# Altium PCB STM32F103RB最小系统.PcbDoc (part 1 of 2)
Units mil, origin at the board's own origin, x right, y up, seen from the top; angles counter-clockwise.
Board outline 1970 x 2120 mil, 2 copper layers (Top Layer, Bottom Layer); 27 components, 58 nets, 187 pads, 61 vias.
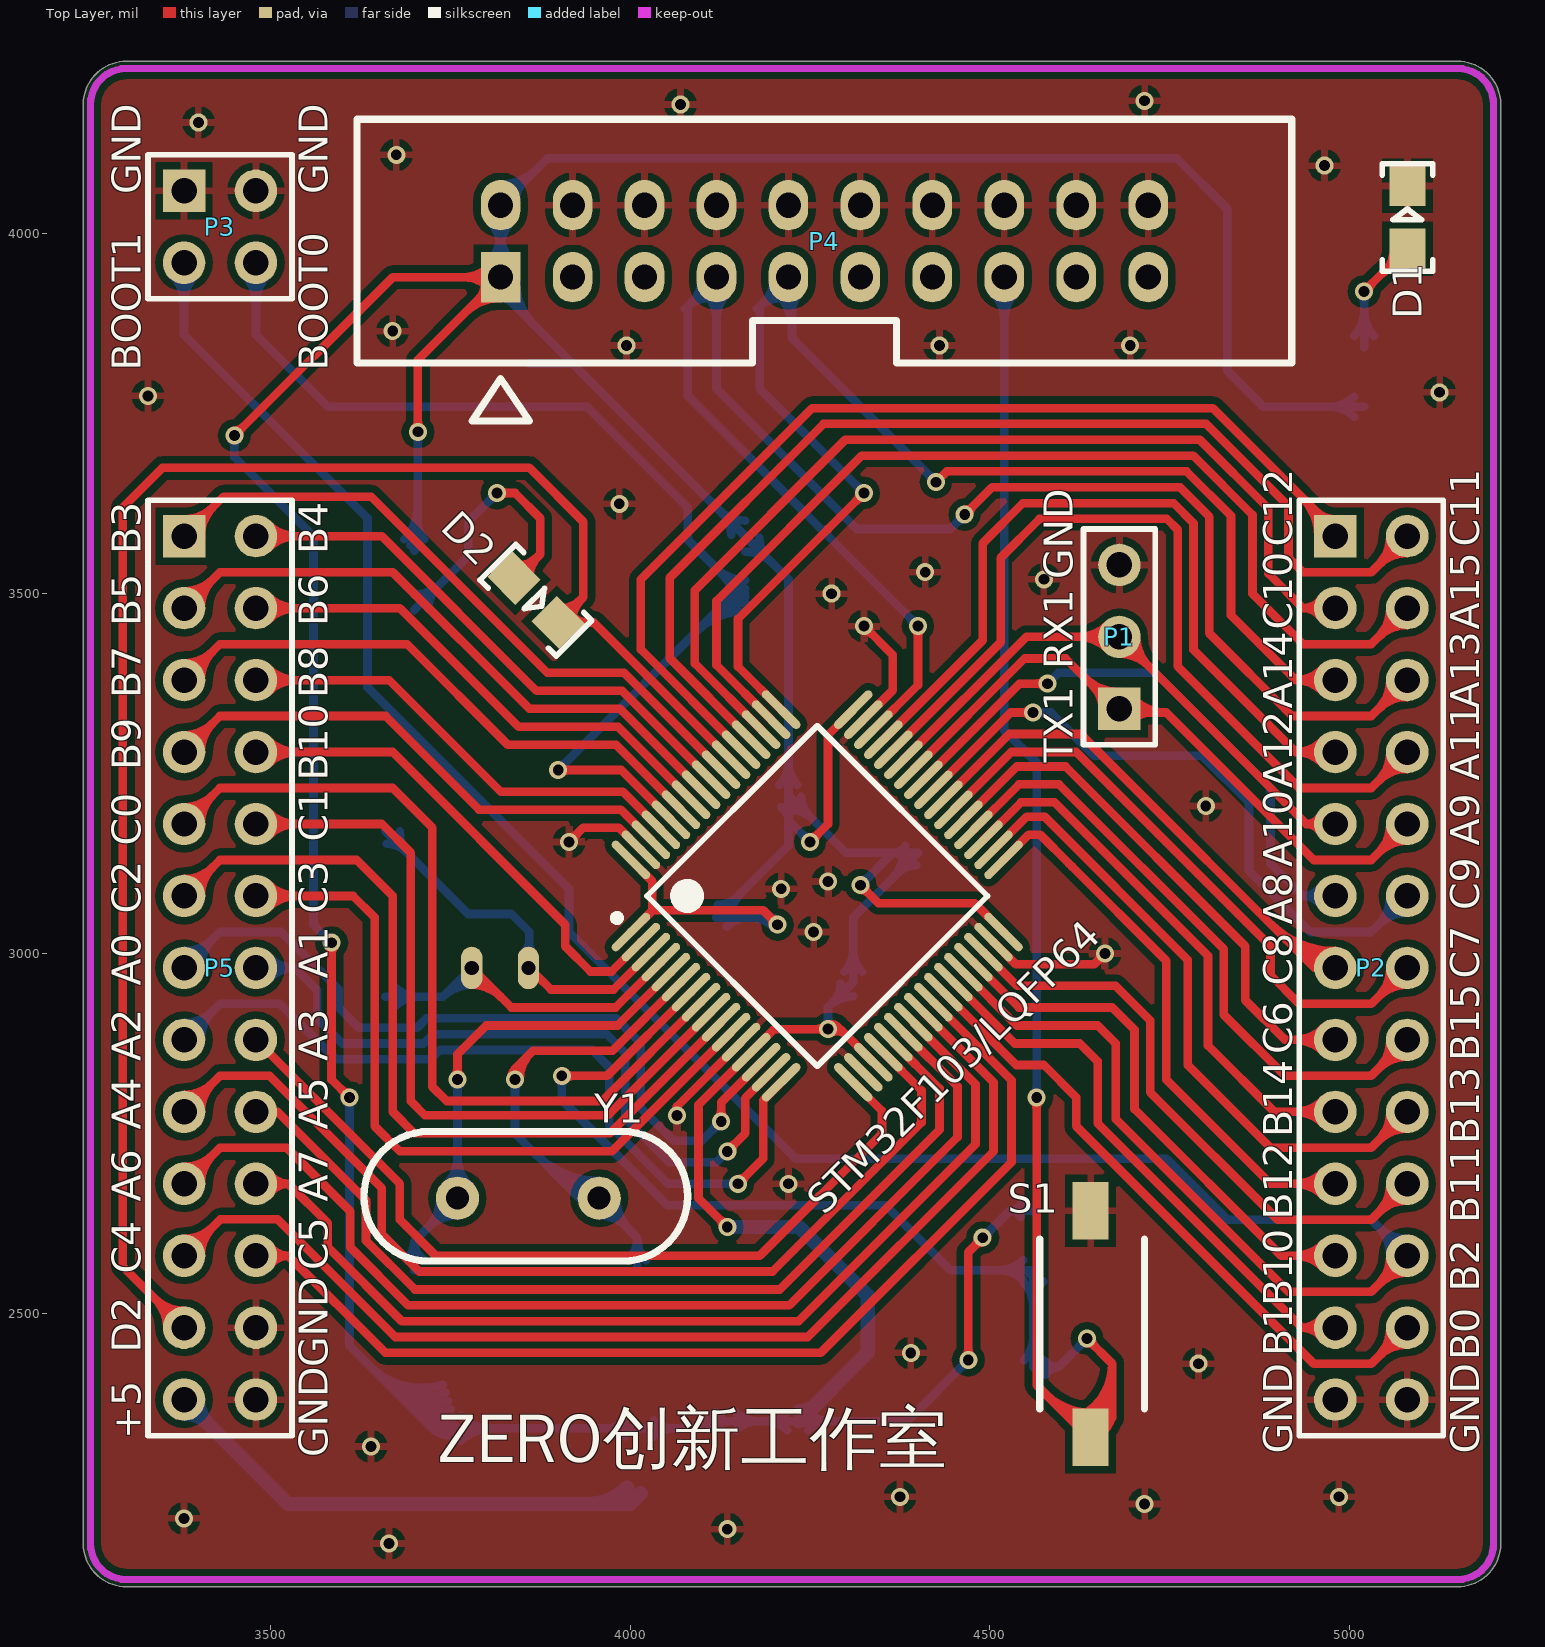
[diagram p0: Top Layer view]
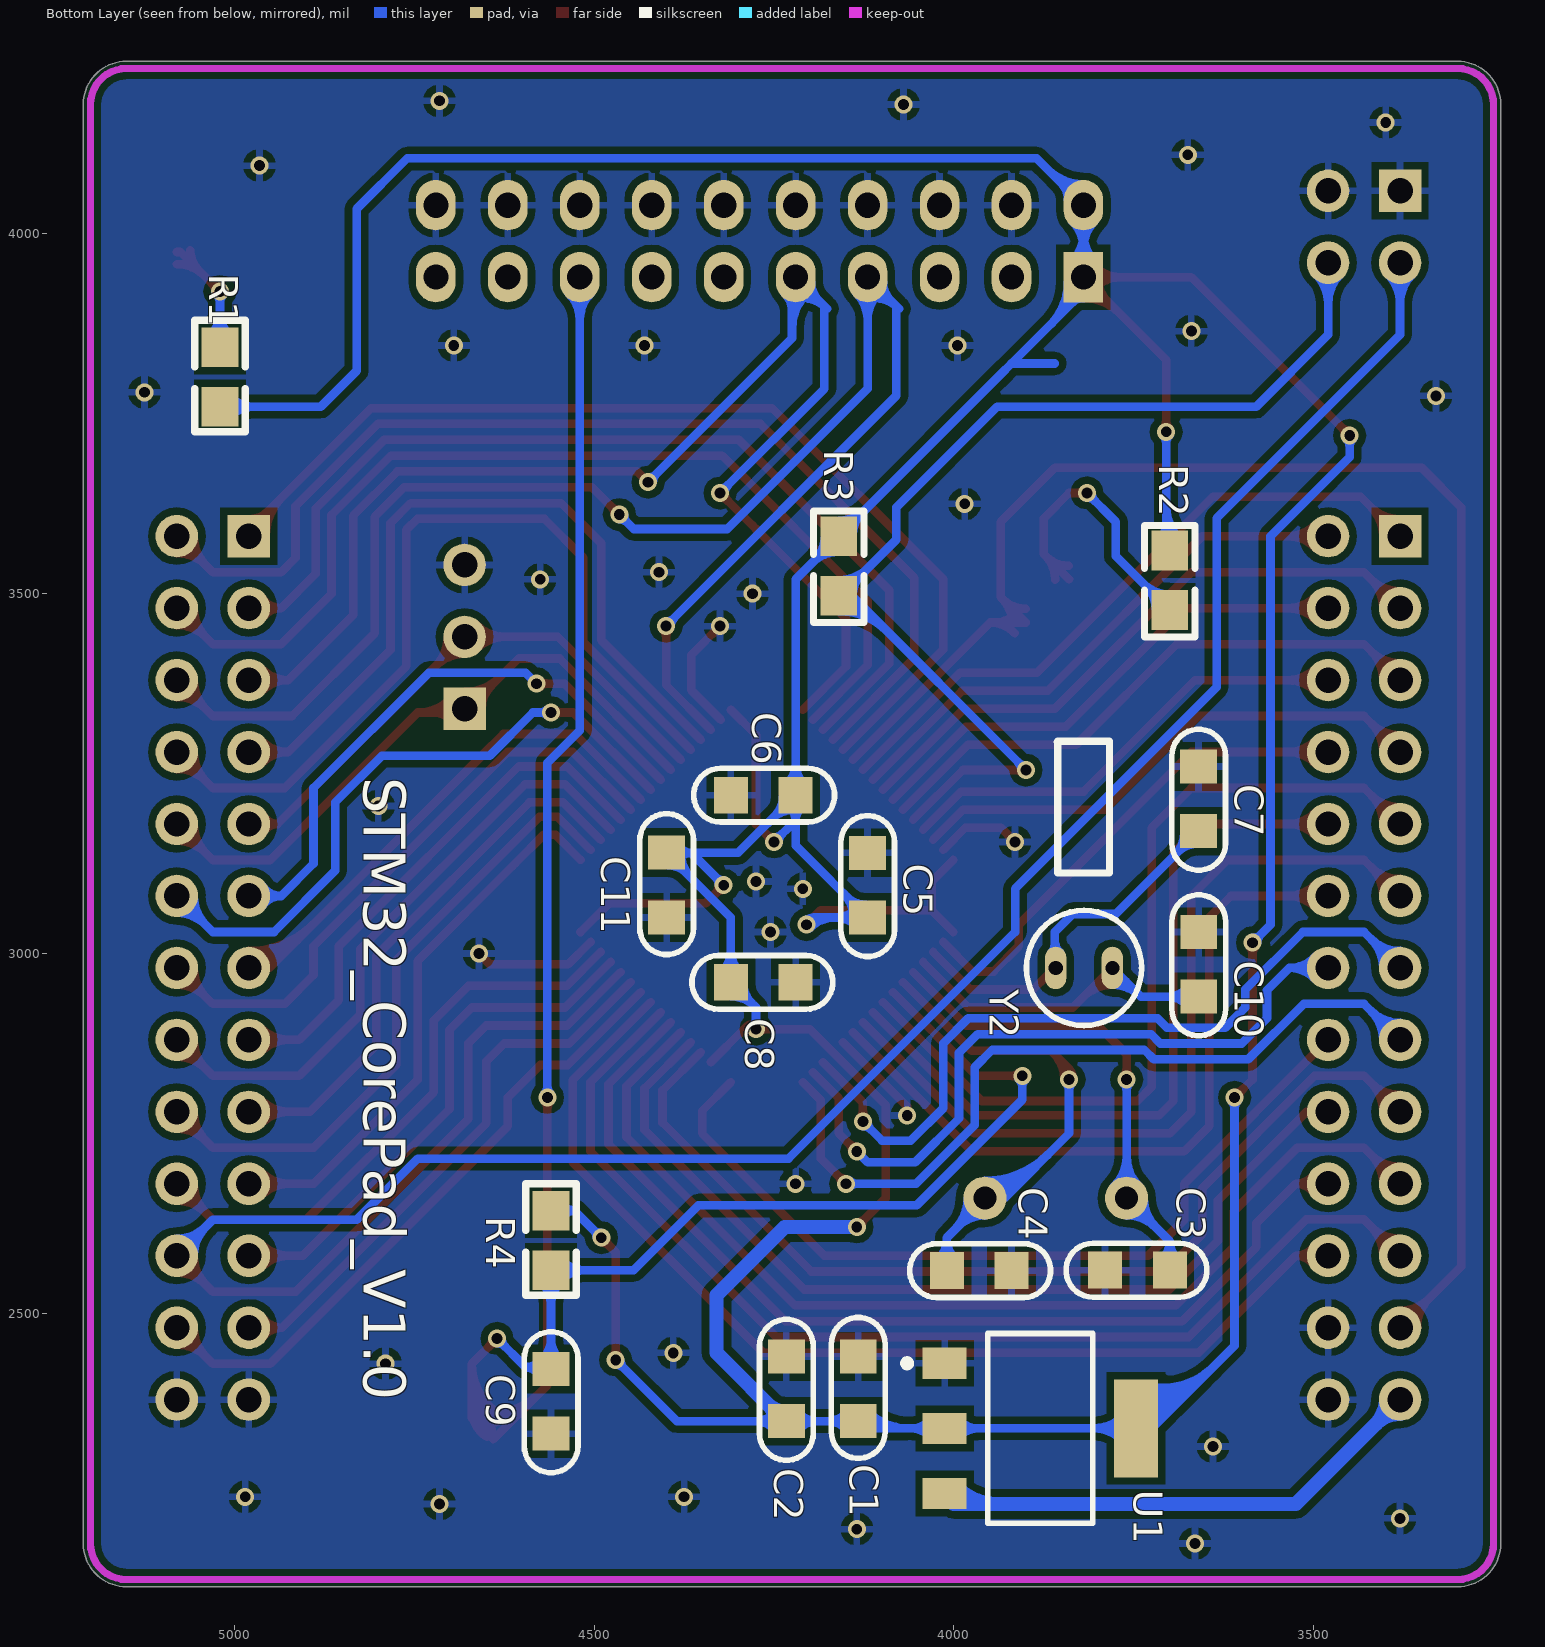
[diagram p1: Bottom Layer view, seen from below]

## Layer stack, top to bottom
Top Layer: signal copper 1.4
Dielectric: dielectric 12.6, FR-4, Dk 4.8
Bottom Layer: signal copper 1.4

## Board outline
3240,4175 3240,2180 ccw(c3300,2180) 3300,2120 5150,2120 ccw(c5150,2180) 5210,2180 5210,4180 ccw(c5150,4180) 5150,4240 3300,4240 ccw(c3300,4180) 3240,4180

## Design rules (kind name [scope] priority, off if disabled: settings)
Clearance [All] p1: gap=10
PolygonConnect [All] p1: connectstyle=Relief reliefconductorwidth=10 reliefentries=4 polygonreliefangle="90 Angle" airgapwidth=10
RoutingVias [All] p1: holewidth=15 width=25 viastyle="Through Hole" minholewidth=15 minwidth=25 maxholewidth=15 maxwidth=25
SilkToSolderMaskClearance SilkscreenOverComponentPads [IsPad] p1: minsilkscreentomaskgap=10 clearancetoexposedcopper=TRUE
SolderMaskExpansion [All] p1: expansion=4
Width [All] p1: maxlimit=20 minlimit=12 preferedwidth=12
27 further rules are at their usual default settings.

## Components (designator, comment, footprint, x,y, rotation, side; value= is the part's Value field where it differs from the comment)
C1 "0.1uF" 0805C 4133.61,2439.86 r0 bottom
C2 "10uF" 0805C 4232.14,2350.14 r180 bottom
C3 "22pF" 0805C 3789.86,2559.27 r270 bottom
C4 "22pF" 0805C 3920,2560 r90 bottom
C5 "0.1uF" 0805C 4119.27,3050.14 r180 bottom
C6 "0.1uF" 0805C 4220.14,3220.73 r90 bottom
C7 "15pF" 0805C 3659.26,3170.14 r180 bottom
C8 "0.1uF" 0805C 4309.86,2959.27 r270 bottom
C9 "0.1uF" 0805C 4559.27,2332.82 r180 bottom
C10 "15pF" 0805C 3659.11,2940.09 r180 bottom
C11 "0.1uF" 0805C 4400,3140 r0 bottom
D1 "LED" LED0805 5080,3980 r90 top
D2 "LED" LED0805 3838.88,3521.49 r315 top
P1 "TTL" HDR1X3 4680,3340 r90 top
P2 "Header 13X2" HDR2X13 4980,3580 r270 top
P3 "Header 2X2" HDR2X2 3380,4060 r270 top
P4 "JTAG" JTAG20 3820,3940 r180 top
P5 "Header 13X2" HDR2X13 3380,3580 r270 top
R1 "1K" 0805R 5020,3760 r90 bottom
R2 "1K" 0805R 3700,3560 r270 bottom
R3 "1K" 0805R 4160,3580 r270 bottom
R4 "10K" 0805R 4560,2560 r90 bottom
S1 "KEY" KEY_SOP 4640,2327.72 r90 top
STM32F103/LQFP64 "STM32F103RBT6" LQFP64_N 4260,3080 r45 top (schematic designator U2)
U1 "REG1117-3.3" ZZ311 3880,2340 r270 bottom
Y1 "8M" OSC2PR-1 3956.45,2660.16 r180 top
Y2 "32.768k" XTAL-B 3820,2980 r0 bottom

## Footprints (in the part's own frame and the unit in brackets; to place one, negate y for a bottom-side part, rotate by r counter-clockwise, add the part's x,y. Pads: shape width x height; smd on the part's side, far side on the other; paste and mask are expansions set on the pad)
0805C [mm]
  rect 1.3x1.2 smd: 1(-0.019,-0.004) 2(-0.019,2.282)
  silkscreen extent -0.97,-1.38 0.93,3.59
0805R [mm] "功率 1/8W"
  rect 1.4x1.3 smd: 1(0,0) 2(2.1,0)
  silkscreen extent -0.89,-0.89 3.05,0.89
HDR1X3 [mm] "Connector; Header; 3 Position"
  rect 1.5x1.5 hole 0.9: 1(0,0)
  round 1.5 hole 0.9: 2(2.54,0) 3(5.08,0)
  silkscreen extent -1.27,-1.27 6.35,1.27
HDR2X2 [mm] "Connector; Header; 2x2 Position"
  rect 1.5x1.5 hole 0.9: 1(0,0)
  round 1.5 hole 0.9: 2(0,2.54) 3(2.54,0) 4(2.54,2.54)
  silkscreen extent -1.27,-1.27 3.81,3.81
HDR2X13 [mm] "Connector; Header; 13x2 Position"
  rect 1.5x1.5 hole 0.9: 1(0,0)
  round 1.5 hole 0.9: 2(0,2.54) 3(2.54,0) 4(2.54,2.54) 5(5.08,0) 6(5.08,2.54) 7(7.62,0) 8(7.62,2.54) 9(10.16,0) 10(10.16,2.54) 11(12.7,0) 12(12.7,2.54) 13(15.24,0) 14(15.24,2.54) 15(17.78,0) 16(17.78,2.54) 17(20.32,0) 18(20.32,2.54) 19(22.86,0) 20(22.86,2.54) 21(25.4,0) 22(25.4,2.54) 23(27.94,0) 24(27.94,2.54) 25(30.48,0) 26(30.48,2.54)
  silkscreen extent -1.27,-1.27 31.75,3.81
JTAG20 [mil]
  rect 55x70 hole 35: 1(0,0)
  oval 55x70 hole 35: 2(0,-100) 3(-100,0) 4(-100,-100) 5(-200,0) 6(-200,-100) 7(-300,0) 8(-300,-100) 9(-400,0) 10(-400,-100) 11(-500,0) 12(-500,-100) 13(-600,0) 14(-600,-100) 15(-700,0) 16(-700,-100) 17(-800,0) 18(-800,-100) 19(-900,0) 20(-900,-100)
  silkscreen extent -1100,-219 200,200
KEY_SOP [mil] "间距 8.68"
  rect 80x50 smd: 1(0,0) 2(314.96,0)
  silkscreen extent 39,-75 276,71
LED0805 [mm]
  rect 1.4x1.27 smd: 1(-0.008,-0.007) 2(2.202,-0.007)
  silkscreen extent -0.81,-0.9 2.99,0.88
LQFP64_N [mm] "Thin QFP, 64-Leads, Body 10x10mm, Pitch 0.5mm, IPC Medium Density"
  oval 1.8x0.3 smd: 1(-5.55,3.75) 2(-5.55,3.25) 3(-5.55,2.75) 4(-5.55,2.25) 5(-5.55,1.75) 6(-5.55,1.25) 7(-5.55,0.75) 8(-5.55,0.25) 9(-5.55,-0.25) 10(-5.55,-0.75) 11(-5.55,-1.25) 12(-5.55,-1.75) 13(-5.55,-2.25) 14(-5.55,-2.75) 15(-5.55,-3.25) 16(-5.55,-3.75) 33(5.55,-3.75) 34(5.55,-3.25) 35(5.55,-2.75) 36(5.55,-2.25) 37(5.55,-1.75) 38(5.55,-1.25) 39(5.55,-0.75) 40(5.55,-0.25) 41(5.55,0.25) 42(5.55,0.75) 43(5.55,1.25) 44(5.55,1.75) 45(5.55,2.25) 46(5.55,2.75) 47(5.55,3.25) 48(5.55,3.75)
  oval 0.3x1.8 smd: 17(-3.75,-5.55) 18(-3.25,-5.55) 19(-2.75,-5.55) 20(-2.25,-5.55) 21(-1.75,-5.55) 22(-1.25,-5.55) 23(-0.75,-5.55) 24(-0.25,-5.55) 25(0.25,-5.55) 26(0.75,-5.55) 27(1.25,-5.55) 28(1.75,-5.55) 29(2.25,-5.55) 30(2.75,-5.55) 31(3.25,-5.55) 32(3.75,-5.55) 49(3.75,5.55) 50(3.25,5.55) 51(2.75,5.55) 52(2.25,5.55) 53(1.75,5.55) 54(1.25,5.55) 55(0.75,5.55) 56(0.25,5.55) 57(-0.25,5.55) 58(-0.75,5.55) 59(-1.25,5.55) 60(-1.75,5.55) 61(-2.25,5.55) 62(-2.75,5.55) 63(-3.25,5.55) 64(-3.75,5.55)
  silkscreen extent -5.67,-4.25 4.25,4.57, body extent -5,-5 5,5, height 1.6
OSC2PR-1 [mil]
  round 60 hole 32: 1(-0.55,0.16) 2(196.45,0.16)
  silkscreen extent -124,-92 326,88
XTAL-B [mm]
  oval 0.75x1.5 hole 0.5: 1(-1.02,0.001) 2(0.98,0.001)
  silkscreen extent -2.05,-8 2.01,2.03
ZZ311 [mm] "SOT-223/SC-73; 4 Leads; Body 6.7 x 7.3 mm, inc. leads (LxW max)"
  rect 1.1x1.55 smd: 1(-2.3,-3.375) 2(0,-3.375) 3(2.3,-3.375)
  rect 3.45x1.55 smd: 4(0,3.375)
  silkscreen extent -3.35,-4.83 3.35,1.85

## Part data
C1 C3 C4 C5 C6 C7 C8 C9 C10 C11: library part Cap, "Capacitor"
C2: library part "Cap Pol1", "Polarized Capacitor (Radial)"
P1: library part "Header 3", "Header, 3-Pin"
P2 P5: "Header, 13-Pin, Dual row"
P3: "Header, 2-Pin, Dual row"
P4: library part "Header 10X2", "Header, 10-Pin, Dual row"
R1 R2 R3 R4: library part Res2, "Resistor"
STM32F103/LQFP64: "STM32 ARM-based 32-bit MCU with 128 Kbytes Flash, 64-pin LQFP, Industrial Temperature"
U1: "800mA and 1A Low Dropout Positive Regulator 2.85V, 3.3V, 5V, and Adjustable"
Y1 Y2: library part XTAL, "Crystal Oscillator"

## Via types
v1: diameter 25, hole 15, Top Layer to Bottom Layer, 61 vias

## Nets (pads, with @x,y where several pads share a name; then routed paths per layer and width w, separated by ;. In a path a pad name is that pad's centre, name@x,y a point inside that pad or via, vN(x,y) a via of type N, cw(c..) or ccw(c..) an arc to the next point about the centre after c; other vN are vias at no path point)
+3.3: C1.2 C2.1 C5.1 C6.1 C8.1 C11.1 P4.1 P4.2 R1.1 R2.1 R3.1 R4.2 STM32F103/LQFP64.1 STM32F103/LQFP64.13 STM32F103/LQFP64.19 STM32F103/LQFP64.32 STM32F103/LQFP64.48 STM32F103/LQFP64.64 U1.2 U1.4 | length 13937.5
  Top Layer w12: v1(3450,3720) 3670,3940 P4.1@3820,3940 3705,3825 v1(3705,3725) ; v1(3585,3015) 3585,2825 v1(3610,2800) ; STM32F103/LQFP64.64@4001.1,3130.11 4030.6,3100.6 4030.6,3059.4 ; STM32F103/LQFP64.1@4025.6,3054.4 STM32F103/LQFP64.1@4001.1,3029.89 4030.6,3059.4 ; v1(4135,2620) 4095,2660 4095,2789.73 STM32F103/LQFP64.13@4168.13,2862.86 4200.27,2895 v1(4275,2895) 4291.89,2895 STM32F103/LQFP64.19@4337.95,2848.94 ; v1(4205,3040) 4185,3060 4031.21,3060 4030.6,3059.4 ; v1(4250,3155) 4275,3180 4275,3303.79 STM32F103/LQFP64.48@4310.11,3338.9 ; v1(4320,3095) 4345,3070 4478.79,3070 STM32F103/LQFP64.32@4518.9,3029.89 ; v1(4470,2435) 4470,2585 v1(4490,2605) ; 3461.1,3731.1 cw(c3450,3742.19) 3450,3726.5 ccw(c3450,3742.19) 3461.1,3731.1 ; 3461.1,3731.1 ccw(c3472.19,3720) 3456.5,3720 cw(c3472.19,3720) 3461.1,3731.1 ; 3585,2999.31 cw(c3600.69,2999.31) 3589.6,3010.4 ccw(c3600.69,2999.31) 3585,2999.31 ; 3585,2999.31 ccw(c3569.31,2999.31) 3580.4,3010.4 cw(c3569.31,2999.31) 3585,2999.31 ; 3598.9,2811.1 cw(c3587.81,2800) 3603.5,2800 ccw(c3587.81,2800) 3598.9,2811.1 ; 3598.9,2811.1 ccw(c3610,2822.19) 3610,2806.5 cw(c3610,2822.19) 3598.9,2811.1 ; 3705,3740.69 cw(c3689.31,3740.69) 3700.4,3729.6 ccw(c3689.31,3740.69) 3705,3740.69 ; 3705,3740.69 ccw(c3720.69,3740.69) 3709.6,3729.6 cw(c3720.69,3740.69) 3705,3740.69 ; 3768.09,3940 cw(c3768.09,3888.09) 3804.8,3924.8 ccw(c3768.09,3888.09) 3768.09,3940 ; 3768.09,3940 ccw(c3768.09,3991.91) 3804.8,3955.2 cw(c3768.09,3991.91) 3768.09,3940 ; 4123.9,2631.1 cw(c4112.81,2620) 4128.5,2620 ccw(c4112.81,2620) 4123.9,2631.1 ; 4123.9,2631.1 ccw(c4135,2642.19) 4135,2626.5 cw(c4135,2642.19) 4123.9,2631.1 ; 4193.9,3051.1 cw(c4182.81,3040) 4198.5,3040 ccw(c4182.81,3040) 4193.9,3051.1 ; 4193.9,3051.1 ccw(c4205,3062.19) 4205,3046.5 cw(c4205,3062.19) 4193.9,3051.1 ; 4259.31,2895 cw(c4259.31,2879.31) 4270.4,2890.4 ccw(c4259.31,2879.31) 4259.31,2895 ; 4259.31,2895 ccw(c4259.31,2910.69) 4270.4,2899.6 cw(c4259.31,2910.69) 4259.31,2895 ; 4261.1,3166.1 cw(c4250,3177.19) 4250,3161.5 ccw(c4250,3177.19) 4261.1,3166.1 ; 4261.1,3166.1 ccw(c4272.19,3155) 4256.5,3155 cw(c4272.19,3155) 4261.1,3166.1 ; 4290.69,2895 cw(c4290.69,2910.69) 4279.6,2899.6 ccw(c4290.69,2910.69) 4290.69,2895 ; 4290.69,2895 ccw(c4290.69,2879.31) 4279.6,2890.4 cw(c4290.69,2879.31) 4290.69,2895 ; 4331.1,3083.9 cw(c4342.19,3095) 4326.5,3095 ccw(c4342.19,3095) 4331.1,3083.9 ; 4331.1,3083.9 ccw(c4320,3072.81) 4320,3088.5 cw(c4320,3072.81) 4331.1,3083.9 ; 4470,2450.69 cw(c4454.31,2450.69) 4465.4,2439.6 ccw(c4454.31,2450.69) 4470,2450.69 ; 4470,2450.69 ccw(c4485.69,2450.69) 4474.6,2439.6 cw(c4485.69,2450.69) 4470,2450.69 ; 4478.9,2593.9 cw(c4490,2582.81) 4490,2598.5 ccw(c4490,2582.81) 4478.9,2593.9 ; 4478.9,2593.9 ccw(c4467.81,2605) 4483.5,2605 cw(c4467.81,2605) 4478.9,2593.9 ; 3770.49,3890.49 cw(c3820,3840.99) 3820,3911 ccw(c3820,3840.99) 3770.49,3890.49 ; 3788.6,3908.6 ccw(c3764.7,3932.5) 3798.5,3932.5 cw(c3764.7,3932.5) 3788.6,3908.6 ; 3790.98,3910.98 cw(c3820,3881.96) 3820,3923 ccw(c3820,3881.96) 3790.98,3910.98 ; v1@4272.22,2899.75 cw(c4279.36,2887.56) 4289.34,2897.55 ccw(c4279.36,2887.56) v1@4272.22,2899.75 ; v1@4278.28,2889.39 cw(c4287.47,2873.7) 4300.33,2886.56 ccw(c4287.47,2873.7) v1@4278.28,2889.39
  Bottom Layer w12: v1(3450,3720) 3450,3690 3560,3580 3560,3040 v1(3585,3015) ; v1(3610,2800) 3610,2455 3725,2340 U1.4@3750,2340 ; 3639.77,2425.23 ccw(c3709.91,2495.37) U1.4@3739.75,2400.78 ; 3653.75,2411.25 ccw(c3716.61,2474.12) U1.4@3743.36,2389.33 ; 3667.73,2397.27 ccw(c3723.32,2452.86) U1.4@3746.97,2377.89 ; 3681.71,2383.29 ccw(c3730.02,2431.61) U1.4@3750.58,2366.45 ; 3695.69,2369.31 ccw(c3736.73,2410.35) U1.4@3754.19,2355 ; R2.1@3700,3560 3705,3565 v1(3705,3725) ; 3709.67,2355.33 ccw(c3743.44,2389.1) U1.4@3757.8,2343.56 ; U1.4@3723.65,2341.35 ccw(c3750.14,2367.84) U1.4@3761.41,2332.11 ; U1.4@3747.13,2340 4015,2340 4120,2340 4130,2350 C1.2@4132.87,2350 C2.1@4232.87,2350 4235,2350 4385,2350 v1(4470,2435) ; U1.4@3764.46,2322.67 cw(c3806.3,2280.82) 3806.3,2340 cw(c3806.3,2399.18) U1.4@3764.46,2357.33 ; 3860,3820 3920,3820 ; 3966.22,2340 ccw(c3966.22,2377.79) U1.2@3992.95,2351.07 ; 3966.23,2340 cw(c3966.23,2302.21) U1.2@3992.95,2328.93 ; U1.2@4032.8,2328.93 cw(c4059.52,2302.21) 4059.52,2340 cw(c4059.52,2377.79) U1.2@4032.8,2351.07 ; 4064.22,2340 ccw(c4064.22,2416.69) C1.2@4118.44,2362.46 ; 4093.19,2340 ccw(c4093.19,2387.71) C1.2@4126.93,2353.98 ; C1.2@4147.3,2337.54 cw(c4177.39,2307.46) 4177.39,2350 cw(c4177.39,2392.54) C1.2@4147.3,2362.46 ; 4195,3050 C5.1@4120,3050 4220,3150 4220,3185 ; C2.1@4218.44,2337.54 ccw(c4188.36,2307.46) 4188.36,2350 ccw(c4188.36,2392.54) C2.1@4218.44,2362.46 ; C2.1@4247.3,2337.54 cw(c4277.39,2307.46) 4277.39,2350 cw(c4277.39,2392.54) C2.1@4247.3,2362.46 ; v1(4250,3155) 4220,3185 ; v1(4275,2895) 4275,2925 C8.1@4310,2960 4310,3050 4400,3140 4365,3140 ; v1(4320,3095) 4365,3140 ; v1(4490,2605) 4527.68,2642.68 ; R4.2@4560,2642.68 4527.68,2642.68 ; R1.1@5020,3760 4880,3760 4830,3810 4830,4035 4760,4105 3885,4105 P4.2@3820,4040 3820,3920 3920,3820 ; 3450,3704.31 cw(c3465.69,3704.31) 3454.6,3715.4 ccw(c3465.69,3704.31) 3450,3704.31 ; 3450,3704.31 ccw(c3434.31,3704.31) 3445.4,3715.4 cw(c3434.31,3704.31) 3450,3704.31 ; 3573.9,3026.1 cw(c3562.81,3015) 3578.5,3015 ccw(c3562.81,3015) 3573.9,3026.1 ; 3573.9,3026.1 ccw(c3585,3037.19) 3585,3021.5 cw(c3585,3037.19) 3573.9,3026.1 ; 3610,2784.31 cw(c3625.69,2784.31) 3614.6,2795.4 ccw(c3625.69,2784.31) 3610,2784.31 ; 3610,2784.31 ccw(c3594.31,2784.31) 3605.4,2795.4 cw(c3594.31,2784.31) 3610,2784.31 ; 3705,3709.31 cw(c3720.69,3709.31) 3709.6,3720.4 ccw(c3720.69,3709.31) 3705,3709.31 ; 3705,3709.31 ccw(c3689.31,3709.31) 3700.4,3720.4 cw(c3689.31,3709.31) 3705,3709.31 ; 3820,3980.59 cw(c3871.91,3980.59) 3835.2,4017.3 ccw(c3871.91,3980.59) 3820,3980.59 ; 3820,3980.59 ccw(c3768.09,3980.59) 3804.8,4017.3 cw(c3768.09,3980.59) 3820,3980.59 ; 3820,3999.41 cw(c3768.09,3999.41) 3804.8,3962.7 ccw(c3768.09,3999.41) 3820,3999.41 ; 3820,3999.41 ccw(c3871.91,3999.41) 3835.2,3962.7 cw(c3871.91,3999.41) 3820,3999.41 ; 3920,3820 3935,3805 R3.1@4160,3580 4220,3520 C6.1@4220,3220 ; 4164.51,3050 cw(c4164.51,3092.54) 4134.43,3062.46 ccw(c4164.51,3092.54) 4164.51,3050 ; 4164.51,3050 ccw(c4164.51,3007.46) 4134.43,3037.54 cw(c4164.51,3007.46) 4164.51,3050 ; 4220,3185 cw(c4242.14,3185) 4229.81,3203.39 ccw(c4242.14,3185) 4220,3185 ; 4220,3185 ccw(c4197.86,3185) 4210.19,3203.39 cw(c4197.86,3185) 4220,3185 ; 4220,3185 C6.1@4220,3220 ; C6.1@4220,3220 4300,3140 4365,3140 ; 4220,3264.51 cw(c4177.46,3264.51) 4207.54,3234.43 ccw(c4177.46,3264.51) 4220,3264.51 ; 4220,3264.51 ccw(c4262.54,3264.51) 4232.46,3234.43 cw(c4262.54,3264.51) 4220,3264.51 ; 4238.9,3166.1 cw(c4227.81,3155) 4243.5,3155 ccw(c4227.81,3155) 4238.9,3166.1 ; 4238.9,3166.1 ccw(c4250,3177.19) 4250,3161.5 cw(c4250,3177.19) 4238.9,3166.1 ; 4275,2910.69 cw(c4259.31,2910.69) 4270.4,2899.6 ccw(c4259.31,2910.69) 4275,2910.69 ; 4275,2910.69 ccw(c4290.69,2910.69) 4279.6,2899.6 cw(c4290.69,2910.69) 4275,2910.69 ; 4310,3004.51 cw(c4267.46,3004.51) 4297.54,2974.43 ccw(c4267.46,3004.51) 4310,3004.51 ; 4310,3004.51 ccw(c4352.54,3004.51) 4322.46,2974.43 cw(c4352.54,3004.51) 4310,3004.51 ; 4331.1,3106.1 cw(c4320,3117.19) 4320,3101.5 ccw(c4320,3117.19) 4331.1,3106.1 ; 4331.1,3106.1 ccw(c4342.19,3095) 4326.5,3095 cw(c4342.19,3095) 4331.1,3106.1 ; 4365,3140 cw(c4365,3119.05) 4382.54,3130.5 ccw(c4365,3119.05) 4365,3140 ; 4365,3140 ccw(c4365,3160.62) 4382.42,3149.58 cw(c4365,3160.62) 4365,3140 ; 4458.9,2423.9 cw(c4470,2412.81) 4470,2428.5 ccw(c4470,2412.81) 4458.9,2423.9 ; 4458.9,2423.9 ccw(c4447.81,2435) 4463.5,2435 cw(c4447.81,2435) 4458.9,2423.9 ; 4501.1,2616.1 cw(c4490,2627.19) 4490,2611.5 ccw(c4490,2627.19) 4501.1,2616.1 ; 4501.1,2616.1 ccw(c4512.19,2605) 4496.5,2605 cw(c4512.19,2605) 4501.1,2616.1 ; 4527.68,2642.68 cw(c4527.68,2625.81) 4542.63,2633.61 ccw(c4527.68,2625.81) 4527.68,2642.68 ; 4527.68,2642.68 ccw(c4527.68,2659.54) 4542.63,2651.74 cw(c4527.68,2659.54) 4527.68,2642.68 ; 4972.7,3760 cw(c4972.7,3712.7) 5006.15,3746.15 ccw(c4972.7,3712.7) 4972.7,3760 ; 4972.7,3760 ccw(c4972.7,3807.3) 5006.15,3773.85 cw(c4972.7,3807.3) 4972.7,3760 ; R2.1@3686.15,3575.82 ccw(c3640.63,3621.34) 3705,3621.34 cw(c3640.63,3621.34) R2.1@3686.15,3575.82 ; R2.1@3694.63,3567.34 ccw(c3669.6,3592.37) 3705,3592.37 cw(c3669.6,3592.37) R2.1@3694.63,3567.34 ; 3705,3597.19 ccw(c3735.22,3597.19) 3713.85,3575.82 cw(c3735.22,3597.19) 3705,3597.19 ; P4.1@3820,3911 cw(c3820,3889.27) 3835.36,3904.64 ccw(c3820,3889.27) P4.1@3820,3911 ; P4.2@3820,4057 ccw(c3820,4098.04) 3849.02,4069.02 cw(c3820,4098.04) P4.2@3820,4057 ; P4.2@3820,4069 ccw(c3820,4139.01) 3869.51,4089.51 cw(c3820,4139.01) P4.2@3820,4069 ; P4.1@3829.5,3932.5 ccw(c3882.61,3932.5) 3845.06,3894.94 cw(c3882.61,3932.5) P4.1@3829.5,3932.5 ; P4.1@3841.5,3932.5 ccw(c3923.58,3932.5) 3865.54,3874.46 cw(c3923.58,3932.5) P4.1@3841.5,3932.5 ; P4.2@3841.5,4047.5 cw(c3875.3,4047.5) 3851.4,4071.4 ccw(c3875.3,4047.5) P4.2@3841.5,4047.5 ; C5.1@4121.97,3067.62 ccw(c4121.97,3105.41) 4148.69,3078.69 cw(c4121.97,3105.41) C5.1@4121.97,3067.62 ; 4123.2,3616.8 ccw(c4160,3653.61) 4160,3601.56 cw(c4160,3653.61) 4123.2,3616.8 ; 4127.95,3612.05 cw(c4097.87,3581.97) 4140.41,3581.97 ccw(c4097.87,3581.97) 4127.95,3612.05 ; C5.1@4139.59,3050 cw(c4186.89,3050) 4153.44,3083.44 ccw(c4186.89,3050) C5.1@4139.59,3050 ; R3.1@4160,3558.44 cw(c4160,3506.39) 4196.8,3543.2 ccw(c4160,3506.39) R3.1@4160,3558.44 ; 4165.17,3050 cw(c4165.17,3000.17) 4200.4,3035.4 ccw(c4165.17,3000.17) 4165.17,3050 ; R3.1@4179.59,3578.03 ccw(c4222.13,3578.03) 4192.05,3547.95 cw(c4222.13,3578.03) R3.1@4179.59,3578.03 ; 4194.14,3050 cw(c4194.14,3029.14) 4208.89,3043.89 ccw(c4194.14,3029.14) 4194.14,3050 ; C6.1@4220,3200.41 cw(c4220,3153.11) 4253.44,3186.56 ccw(c4220,3153.11) C6.1@4220,3200.41 ; C6.1@4237.62,3218.03 ccw(c4275.41,3218.03) 4248.69,3191.31 cw(c4275.41,3218.03) C6.1@4237.62,3218.03 ; 4276.56,2926.56 cw(c4310,2893.11) 4310,2940.41 ccw(c4310,2893.11) 4276.56,2926.56 ; 4281.31,2931.31 ccw(c4254.59,2958.03) 4292.38,2958.03 cw(c4254.59,2958.03) 4281.31,2931.31 ; 4365.21,3105.21 ccw(c4330.27,3140.14) 4379.68,3140.14 cw(c4330.27,3140.14) 4365.21,3105.21 ; 4372.06,3112.06 cw(c4397.3,3086.83) 4397.3,3122.52 ccw(c4397.3,3086.83) 4372.06,3112.06
  Bottom Layer w20: v1(4135,2620) 4235,2620 4330,2525 4330,2445 C2.1@4235,2350 ; C2.1@4234.84,2363.62 ccw(c4234.84,2396.89) C2.1@4258.37,2373.37 ; C2.1@4248.46,2350 cw(c4280.97,2350) C2.1@4257.99,2372.99
+5: P5.25 U1.3 | length 910.2
  Bottom Layer w20: P5.25@3380,2380 3525,2235 4000,2235 U1.3@4015,2250 ; 3941,2235 ccw(c3941,2312.47) U1.3@3995.78,2257.69 ; 3413.34,2346.66 cw(c3446.67,2380) 3399.53,2380 ccw(c3446.67,2380) 3413.34,2346.66 ; 3413.34,2346.66 ccw(c3380,2313.33) 3380,2360.47 cw(c3380,2313.33) 3413.34,2346.66
BOOT0: P3.4 R3.2 STM32F103/LQFP64.60 | length 2283
  Top Layer w12: v1(3900,3255) 3987.56,3255 STM32F103/LQFP64.60@4056.78,3185.79 ; 3915.69,3255 cw(c3915.69,3270.69) 3904.6,3259.6 ccw(c3915.69,3270.69) 3915.69,3255 ; 3915.69,3255 ccw(c3915.69,3239.31) 3904.6,3250.4 cw(c3915.69,3239.31) 3915.69,3255
  Bottom Layer w12: P3.4@3480,3960 3480,3860 3580,3760 3940,3760 4080,3620 4080,3575 4160,3495 4140,3495 v1(3900,3255) ; 3480,3903.2 cw(c3536.8,3903.2) 3496.64,3943.36 ccw(c3536.8,3903.2) 3480,3903.2 ; 3480,3903.2 ccw(c3423.2,3903.2) 3463.36,3943.36 cw(c3423.2,3903.2) 3480,3903.2 ; 3911.1,3266.1 cw(c3900,3277.19) 3900,3261.5 ccw(c3900,3277.19) 3911.1,3266.1 ; 3911.1,3266.1 ccw(c3922.19,3255) 3906.5,3255 cw(c3922.19,3255) 3911.1,3266.1 ; 4093.02,3448.02 cw(c4160,3381.04) 4160,3475.76 ccw(c4160,3381.04) 4093.02,3448.02 ; 4113.5,3468.5 cw(c4160,3422.01) 4160,3487.76 ccw(c4160,3422.01) 4113.5,3468.5 ; 4119.23,3535.77 ccw(c4160,3576.53) 4160,3518.88 cw(c4160,3576.53) 4119.23,3535.77 ; 4129.59,3525.41 cw(c4103.47,3499.29) 4140.41,3499.29 ccw(c4103.47,3499.29) 4129.59,3525.41 ; 4133.99,3488.99 cw(c4160,3462.98) 4160,3499.76 ccw(c4160,3462.98) 4133.99,3488.99 ; R3.2@4139.72,3515.28 ccw(c4160,3535.56) 4160,3506.88 cw(c4160,3535.56) R3.2@4139.72,3515.28
BOOT1: P2.22 P3.3 STM32F103/LQFP64.28 | length 3926.3
  Top Layer w12: STM32F103/LQFP64.28@4463.22,2974.21 4537.44,2900 4650,2900 4675,2875 4675,2770 4915,2530 5030,2530 P2.22@5080,2580 ; 5039.84,2539.84 cw(c5080,2499.67) 5080,2556.47 ccw(c5080,2499.67) 5039.84,2539.84 ; 5039.84,2539.84 ccw(c4999.67,2580) 5056.47,2580 cw(c4999.67,2580) 5039.84,2539.84
  Bottom Layer w12: P3.3@3380,3960 3380,3860 3635,3605 3635,3370 3915,3090 3915,3030 4230,2715 4275,2715 ; 4270,2715 4275,2715 ; P2.22@5080,2580 5030,2630 4830,2630 4745,2715 4275,2715 ; 3380,3903.2 cw(c3436.8,3903.2) 3396.64,3943.36 ccw(c3436.8,3903.2) 3380,3903.2 ; 3380,3903.2 ccw(c3323.2,3903.2) 3363.36,3943.36 cw(c3323.2,3903.2) 3380,3903.2 ; 5039.84,2620.16 cw(c4999.67,2580) 5056.47,2580 ccw(c4999.67,2580) 5039.84,2620.16 ; 5039.84,2620.16 ccw(c5080,2660.33) 5080,2603.53 cw(c5080,2660.33) 5039.84,2620.16
GND: C1.1 C2.2 C3.1 C4.1 C5.2 C6.2 C7.2 C8.2 C9.1 C10.2 C11.2 D1.2 P1.3 P2.25 P2.26 P3.1 P3.2 P4.4 P4.6 P4.8 P4.10 P4.12 P4.14 P4.16 P4.18 P4.20 P5.24 P5.26 S1.2 STM32F103/LQFP64.12 STM32F103/LQFP64.18 STM32F103/LQFP64.31 STM32F103/LQFP64.47 STM32F103/LQFP64.63 U1.1 | length 696.1
  Top Layer w12: v1(3915,3155) 3935,3175 3984.05,3175 STM32F103/LQFP64.63@4015.02,3144.03 ; v1(4065,2775) 4065,2787.56 STM32F103/LQFP64.12@4154.21,2876.78 ; STM32F103/LQFP64.47@4324.03,3324.98 4365,3365.95 4365,3415 v1(4325,3455) ; STM32F103/LQFP64.31@4504.98,3015.97 4535.95,2985 4645,2985 v1(4660,3000) ; 3926.1,3166.1 cw(c3915,3177.19) 3915,3161.5 ccw(c3915,3177.19) 3926.1,3166.1 ; 3926.1,3166.1 ccw(c3937.19,3155) 3921.5,3155 cw(c3937.19,3155) 3926.1,3166.1 ; 4336.1,3443.9 cw(c4347.19,3455) 4331.5,3455 ccw(c4347.19,3455) 4336.1,3443.9 ; 4336.1,3443.9 ccw(c4325,3432.81) 4325,3448.5 cw(c4325,3432.81) 4336.1,3443.9
  other v1: 3665,2180 4135,2200 3380,2215 4715,2235 4375,2245 4985,2245 3640,2315 4790,2430 4390,2445 4220,2680 4255,3030 4210,3090 4275,3100 4800,3205 4280,3500 4575,3520 4410,3530 3985,3625 3330,3775 5125,3780 3995,3845 4430,3845 4695,3845 3670,3865 4965,4095 3675,4110 3400,4155 4070,4180 4715,4185
NetC3_2: C3.2 STM32F103/LQFP64.5 Y1.2 | length 1243.5
  Top Layer w12: v1(3760,2825) 3760,2860 3800,2900 3982.56,2900 STM32F103/LQFP64.5@4056.78,2974.21 ; 3760,2840.69 cw(c3744.31,2840.69) 3755.4,2829.6 ccw(c3744.31,2840.69) 3760,2840.69 ; 3760,2840.69 ccw(c3775.69,2840.69) 3764.6,2829.6 cw(c3775.69,2840.69) 3760,2840.69
  Bottom Layer w12: C3.2@3700,2560 3700,2600 ; v1(3760,2825) Y1.2@3760,2660 3700,2600 ; 3700,2600 cw(c3667.78,2600) 3688.61,2575.41 ccw(c3667.78,2600) 3700,2600 ; 3700,2600 ccw(c3732.22,2600) 3711.39,2575.41 cw(c3732.22,2600) 3700,2600 ; 3719.03,2619.03 cw(c3760,2578.06) 3760,2636 ccw(c3760,2578.06) 3719.03,2619.03 ; 3719.03,2619.03 ccw(c3678.06,2660) 3736,2660 cw(c3678.06,2660) 3719.03,2619.03 ; 3760,2717.94 cw(c3702.06,2717.94) 3743.03,2676.97 ccw(c3702.06,2717.94) 3760,2717.94 ; 3760,2717.94 ccw(c3817.94,2717.94) 3776.97,2676.97 cw(c3817.94,2717.94) 3760,2717.94 ; 3760,2809.31 cw(c3775.69,2809.31) 3764.6,2820.4 ccw(c3775.69,2809.31) 3760,2809.31 ; 3760,2809.31 ccw(c3744.31,2809.31) 3755.4,2820.4 cw(c3744.31,2809.31) 3760,2809.31
NetC4_2: C4.2 STM32F103/LQFP64.6 Y1.1 | length 1630.6
  Top Layer w12: v1(3840,2825) 3840,2840 3865,2865 3975.4,2865 STM32F103/LQFP64.6@4070.7,2960.29 ; v1@3834.5,2825 cw(c3857.43,2825) 3841.22,2841.22 ccw(c3857.43,2825) v1@3834.5,2825 ; v1@3846.5,2825 cw(c3898.41,2825) 3861.7,2861.7 ccw(c3898.41,2825) v1@3846.5,2825
  Bottom Layer w12: v1(3840,2825) 3840,2750 3930,2660 Y1.1@3955,2660 ; Y1.1@3960,2660 Y1.1@3955,2660 ; C4.2@4009.86,2559.27 4009.86,2605.14 Y1.1@3955,2660 ; 3840,2809.31 cw(c3855.69,2809.31) 3844.6,2820.4 ccw(c3855.69,2809.31) 3840,2809.31 ; 3840,2809.31 ccw(c3824.31,2809.31) 3835.4,2820.4 cw(c3824.31,2809.31) 3840,2809.31 ; 4009.86,2603.78 cw(c3967.32,2603.78) 3997.4,2573.7 ccw(c3967.32,2603.78) 4009.86,2603.78 ; 4009.86,2603.78 ccw(c4052.41,2603.78) 4022.32,2573.7 cw(c4052.41,2603.78) 4009.86,2603.78 ; 3869.94,2720.06 ccw(c3957,2807.13) 3957,2684 cw(c3957,2807.13) 3869.94,2720.06 ; 3890.42,2699.58 ccw(c3957,2766.16) 3957,2672 cw(c3957,2766.16) 3890.42,2699.58 ; 3910.91,2679.09 ccw(c3957,2725.19) Y1.1@3957,2660 cw(c3957,2725.19) 3910.91,2679.09 ; Y1.1@3957,2636 cw(c3957,2582.89) 3994.55,2620.45 ccw(c3957,2582.89) Y1.1@3957,2636 ; Y1.1@3969,2660 ccw(c4002.8,2660) 3978.9,2636.1 cw(c4002.8,2660) Y1.1@3969,2660 ; Y1.1@3981,2660 ccw(c4043.78,2660) 3999.39,2615.61 cw(c4043.78,2660) Y1.1@3981,2660
NetC7_1: C7.1 STM32F103/LQFP64.3 Y2.2 | length 764.8
  Top Layer w12: Y2.2@3860,2980 3890,2950 3976.89,2950 STM32F103/LQFP64.3@4028.94,3002.05 ; Y2.2@3857.53,2980.39 cw(c3857.83,2976.13) 3860.85,2979.15 ccw(c3857.83,2976.13) Y2.2@3857.53,2980.39 ; Y2.2@3858.37,2968.42 cw(c3860.25,2941.29) 3879.48,2960.52 ccw(c3860.25,2941.29) Y2.2@3858.37,2968.42
  Bottom Layer w12: C7.1@3660,3170 3775,3055 3835,3055 3860,3030 Y2.2@3860,2980 ; C7.1@3661.97,3152.38 cw(c3661.97,3114.59) 3688.69,3141.31 ccw(c3661.97,3114.59) C7.1@3661.97,3152.38 ; C7.1@3679.59,3170 ccw(c3726.89,3170) 3693.44,3136.56 cw(c3726.89,3170) C7.1@3679.59,3170 ; Y2.2@3852.39,3000.91 ccw(c3834.03,3019.28) 3860,3019.28 cw(c3834.03,3019.28) Y2.2@3852.39,3000.91 ; 3860,3012.47 ccw(c3876.34,3012.47) 3864.79,3000.91 cw(c3876.34,3012.47) 3860,3012.47
NetC10_1: C10.1 STM32F103/LQFP64.4 Y2.1 | length 848.8
  Top Layer w12: Y2.1@3780,2980 3835,2925 3979.73,2925 STM32F103/LQFP64.4@4042.86,2988.13 ; Y2.1@3779.85,2956.43 cw(c3779.85,2899.15) 3820.35,2939.65 ccw(c3779.85,2899.15) Y2.1@3779.85,2956.43 ; Y2.1@3779.85,2968.43 cw(c3779.85,2940.12) 3799.86,2960.14 ccw(c3779.85,2940.12) Y2.1@3779.85,2968.43
  Bottom Layer w12: C10.1@3659.85,2939.95 3739.95,2939.95 Y2.1@3780,2980 ; 3704.36,2939.95 cw(c3704.36,2982.5) 3674.28,2952.41 ccw(c3704.36,2982.5) 3704.36,2939.95 ; 3704.36,2939.95 ccw(c3704.36,2897.41) 3674.28,2927.49 cw(c3704.36,2897.41) 3704.36,2939.95 ; 3739.86,2939.86 cw(c3779.85,2899.88) 3779.85,2956.43 ccw(c3779.85,2899.88) 3739.86,2939.86 ; 3760.35,2960.35 cw(c3779.85,2940.85) 3779.85,2968.43 ccw(c3779.85,2940.85) 3760.35,2960.35
NetD1_1: D1.1 R1.2 | length 551.4
  Top Layer w12: v1(5020,3920) 5075,3975 D1.1@5080,3975 ; 5031.1,3931.1 cw(c5020,3942.19) 5020,3926.5 ccw(c5020,3942.19) 5031.1,3931.1 ; 5031.1,3931.1 ccw(c5042.19,3920) 5026.5,3920 cw(c5042.19,3920) 5031.1,3931.1 ; 5042.49,3942.49 cw(c5080.26,3904.72) 5080.26,3958.13 ccw(c5080.26,3904.72) 5042.49,3942.49 ; 5050.04,3950.04 ccw(c5022.94,3977.13) 5061.26,3977.13 cw(c5022.94,3977.13) 5050.04,3950.04
  Bottom Layer w12: R1.2@5020,3842.68 v1(5020,3920) ; 5020,3891.94 cw(c4972.7,3891.94) 5006.15,3858.5 ccw(c4972.7,3891.94) 5020,3891.94 ; 5020,3891.94 ccw(c5067.3,3891.94) 5033.85,3858.5 cw(c5067.3,3891.94) 5020,3891.94 ; 5020,3904.31 cw(c5035.69,3904.31) 5024.6,3915.4 ccw(c5035.69,3904.31) 5020,3904.31 ; 5020,3904.31 ccw(c5004.31,3904.31) 5015.4,3915.4 cw(c5004.31,3904.31) 5020,3904.31
NetD2_1: D2.1 R2.2 | length 775.6
  Top Layer w12: v1(3815,3640) 3840,3640 3875,3605 3875,3555 D2.1@3840,3520 ; 3830.69,3640 cw(c3830.69,3655.69) 3819.6,3644.6 ccw(c3830.69,3655.69) 3830.69,3640 ; 3830.69,3640 ccw(c3830.69,3624.31) 3819.6,3635.4 cw(c3830.69,3624.31) 3830.69,3640 ; D2.1@3840.29,3538.71 ccw(c3840.29,3583.21) 3871.75,3551.75 cw(c3840.29,3583.21) D2.1@3840.29,3538.71 ; D2.1@3859.29,3519.71 cw(c3906.53,3519.71) 3873.12,3553.12 ccw(c3906.53,3519.71) D2.1@3859.29,3519.71
  Bottom Layer w12: R2.2@3700,3477.32 3775,3552.32 3775,3600 v1(3815,3640) ; 3803.9,3628.9 cw(c3815,3617.81) 3815,3633.5 ccw(c3815,3617.81) 3803.9,3628.9 ; 3803.9,3628.9 ccw(c3792.81,3640) 3808.5,3640 cw(c3792.81,3640) 3803.9,3628.9 ; R2.2@3700,3498.88 ccw(c3700,3550.93) 3736.8,3514.13 cw(c3700,3550.93) R2.2@3700,3498.88 ; R2.2@3719.59,3479.29 cw(c3762.13,3479.29) 3732.05,3509.37 ccw(c3762.13,3479.29) R2.2@3719.59,3479.29